# EAGLE board sanguino_stepstickers (EAGLE 6.3)
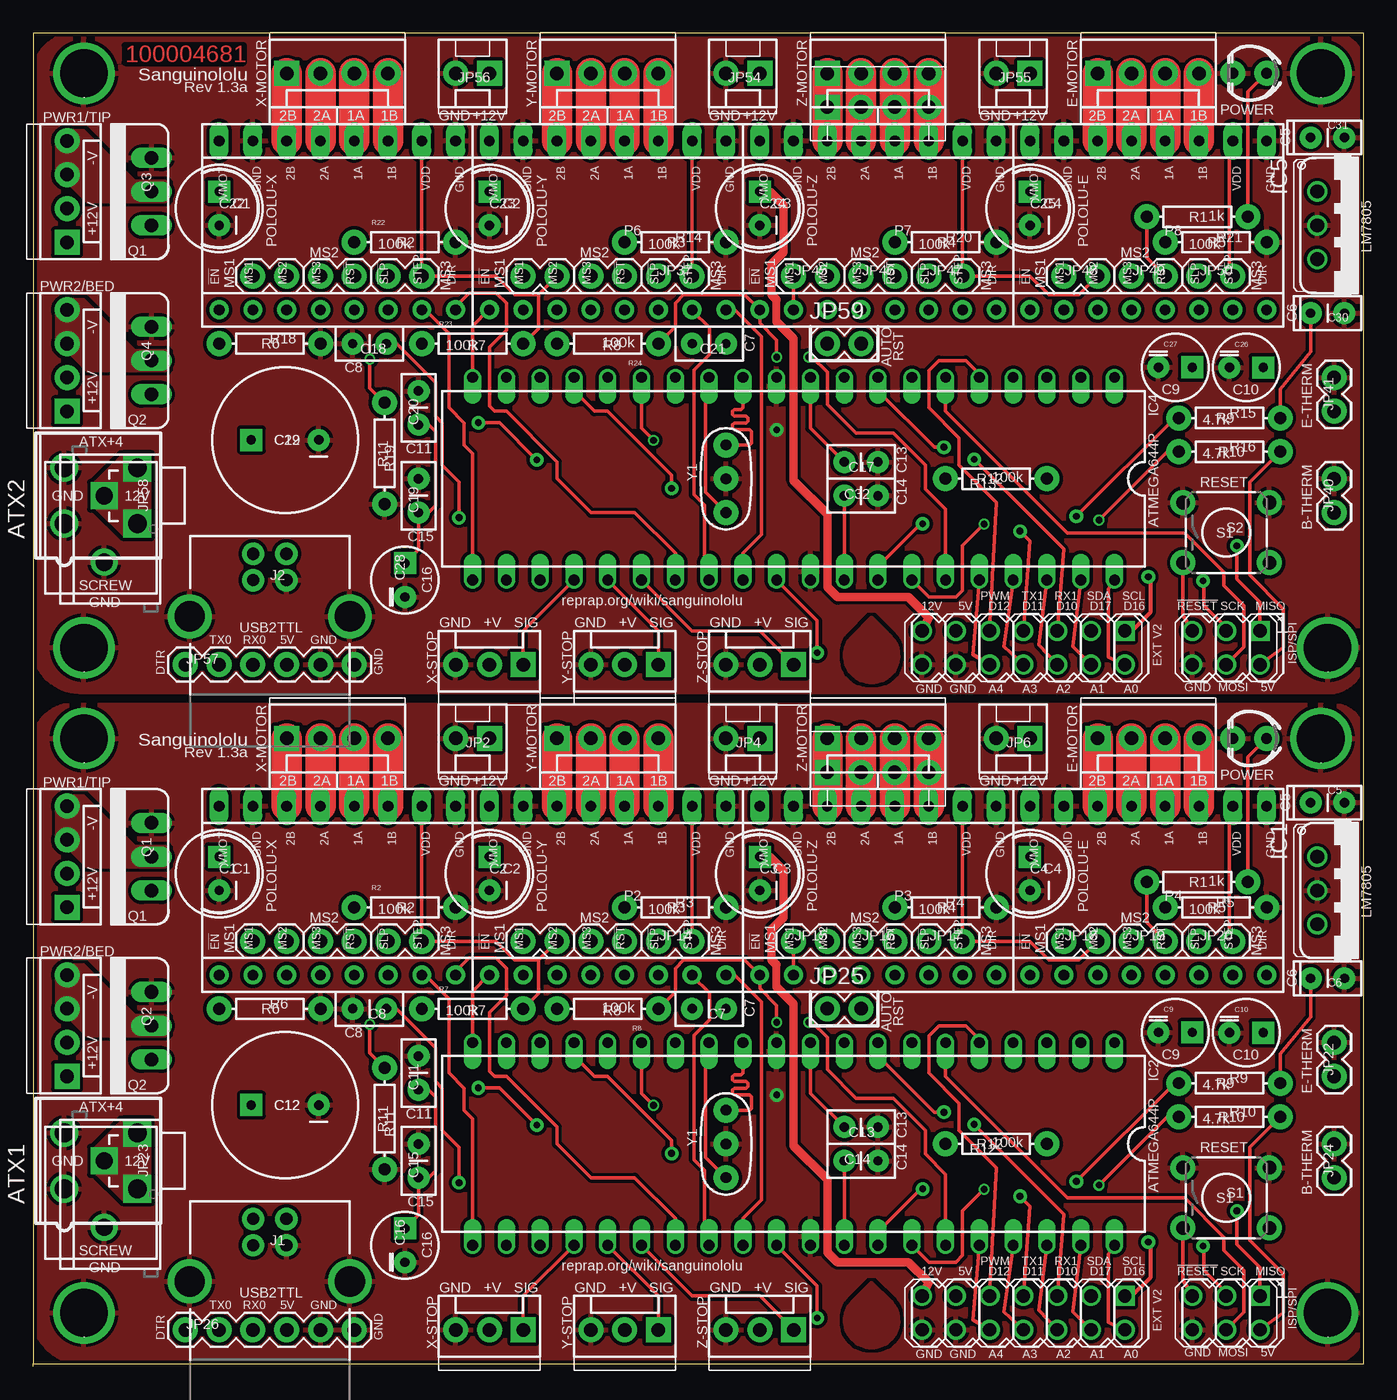
[diagram p0: board, top side]
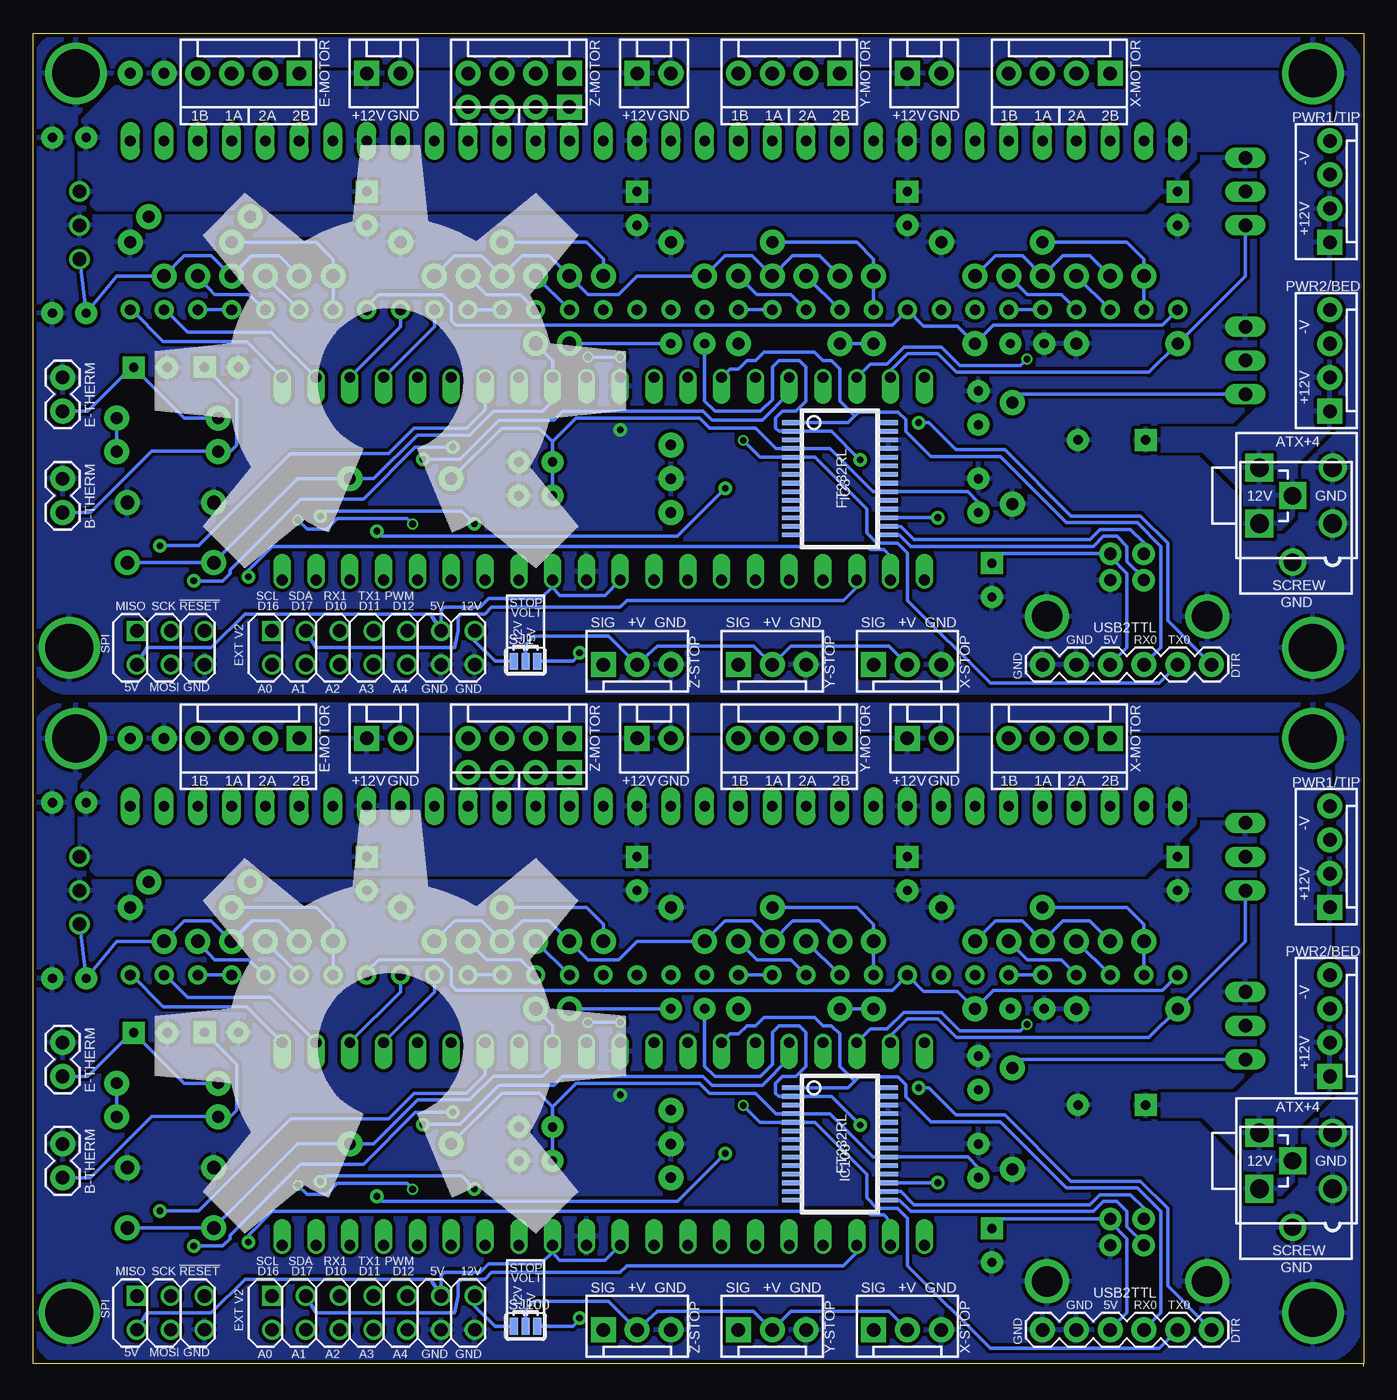
[diagram p1: board, bottom side, seen from below]

Size 100 x 100.2 mm. Coordinates in mm from the lower left corner, seen from the top.
Outline: 0,0 0,0.2
Outline: 0,0.2 100,0.2 100,100.2 0,100.2 0,0.2
Copper layers (1*16): Top 0.035mm / dielectric 1.5mm / Bottom 0.035mm
Design rules "ITead_rule": minimum track width 6mil, minimum drill 12mil, track to track 6mil, track to pad 6mil, pad to pad 6mil, via to via 6mil, smd to smd 0mil, copper to edge 10mil, drill to drill 10mil, minimum pad ring 10mil, minimum via ring 6mil, stop-mask expansion 2mil, vias tented up to drill 100mil, thermal gap 10mil

## Footprints (pad centres in the part's own frame; a part is rotated, then mirrored left to right if it is on the bottom)
MINIFITJR-4-VERTICAL = drill 1.4: 1 2.1,-2.75; 2 -2.1,-2.75 | drill 1.4 square: 3 2.1,2.75; 4 -2.1,2.75
CPOL-RADIAL-100UF-25V = drill 0.7 pad 1.651 square: 1 1.27,0 | drill 0.7 pad 1.651: 2 -1.27,0
CAP-PTH-SMALL2 = drill 0.7 pad 1.651: 1 0,0; 2 2.54,0
CPOL-RADIAL-10UF-25V = drill 0.7 pad 1.651 square: 1 1.27,0 | drill 0.7 pad 1.651: 2 -1.27,0
CPOL-RADIAL-1000UF-25V = drill 0.7 pad 1.651 square: 1 2.54,0 | drill 0.7 pad 1.651: 2 -2.54,0
78XXL-CUSTOM = drill 1.016: GND 0,0; IN -2.54,0; OUT 2.54,0
DIL40 = drill 0.813 offset: 1 -24.13,-7.62; 2 -21.59,-7.62; 3 -19.05,-7.62; 4 -16.51,-7.62; 5 -13.97,-7.62; 6 -11.43,-7.62; 7 -8.89,-7.62; 8 -6.35,-7.62; 9 -3.81,-7.62; 10 -1.27,-7.62; 11 1.27,-7.62; 12 3.81,-7.62; 13 6.35,-7.62; 14 8.89,-7.62; 15 11.43,-7.62; 16 13.97,-7.62; 17 16.51,-7.62; 18 19.05,-7.62; 19 21.59,-7.62; 20 24.13,-7.62; 21 24.13,7.62; 22 21.59,7.62; 23 19.05,7.62; 24 16.51,7.62; 25 13.97,7.62; 26 11.43,7.62; 27 8.89,7.62; 28 6.35,7.62; 29 3.81,7.62; 30 1.27,7.62; 31 -1.27,7.62; 32 -3.81,7.62; 33 -6.35,7.62; 34 -8.89,7.62; 35 -11.43,7.62; 36 -13.97,7.62; 37 -16.51,7.62; 38 -19.05,7.62; 39 -21.59,7.62; 40 -24.13,7.62
SSOP28DB = smd 0.348 x 1.397: 1 -4.225,-3.656; 2 -3.575,-3.656; 3 -2.925,-3.656; 4 -2.275,-3.656; 5 -1.625,-3.656; 6 -0.975,-3.656; 7 -0.325,-3.656; 8 0.325,-3.656; 9 0.975,-3.656; 10 1.625,-3.656; 11 2.275,-3.656; 12 2.925,-3.656; 13 3.575,-3.656; 14 4.225,-3.656; 15 4.225,3.656; 16 3.575,3.656; 17 2.925,3.656; 18 2.275,3.656; 19 1.625,3.656; 20 0.975,3.656; 21 0.325,3.656; 22 -0.325,3.656; 23 -0.975,3.656; 24 -1.625,3.656; 25 -2.275,3.656; 26 -2.925,3.656; 27 -3.575,3.656; 28 -4.225,3.656
USB-B-PTH = drill 0.914 pad 1.676: D+ 0,1.25; D- 1.981,1.25; GND 0,-1.25; VBUS 1.981,-1.25 | drill 2.286: P$1 -2.718,-6.02; P$2 -2.718,6.02
MOLEX-1X4 = drill 1.016 pad 1.88 square: 1 0,0 | drill 1.016 pad 1.88: 2 2.54,0; 3 5.08,0; 4 7.62,0
MOLEX-1X2 = drill 1.016 pad 1.88 square: 1 0,0 | drill 1.016 pad 1.88: 2 2.54,0
1X02 = drill 1.016 pad 1.88: 1 0,0; 2 2.54,0
SCREWTERMINAL-5MM-2 = drill 1.3 pad 2.032 square: 1 0,0 | drill 1.3 pad 2.032: 2 5,0
1X06 = drill 1.016 pad 1.88: 1 0,0; 2 2.54,0; 3 5.08,0; 4 7.62,0; 5 10.16,0; 6 12.7,0
MOLEX-1X3 = drill 1.016 pad 1.88 square: 1 0,0 | drill 1.016 pad 1.88: 2 2.54,0; 3 5.08,0
LED3MM = drill 0.813 pad 1.88: A -1.27,0; K 1.27,0
POLOLU-ALLEGRO-PTH = drill 0.8 pad 1.422 long: 1A 6.35,-1.27; 1B 6.35,-3.81; 2A 6.35,1.27; 2B 6.35,3.81; GNDMOT 6.35,6.35; GNDVDD 6.35,-8.89; VDD 6.35,-6.35; VMOT 6.35,8.89 | drill 0.8 pad 1.422: !EN -6.35,8.89; !RST -6.35,-1.27; !SLP -6.35,-3.81; DIR -6.35,-8.89; MS1 -6.35,6.35; MS2 -6.35,3.81; MS3 -6.35,1.27; STEP -6.35,-6.35
TO220V = drill 1.016 long: 1 -2.54,0; 2 0,0; 3 2.54,0
AXIAL-0.3 = drill 0.9 pad 1.88: P$1 -3.81,0; P$2 3.81,0
TACTILE-PTH = drill 1.016 pad 1.88: 1 -3.251,2.261; 2 3.251,2.261; 3 -3.251,-2.261; 4 3.251,-2.261
SJ_3 = smd 0.635 x 1.27: 1 -0.889,0; 2 0,0; 3 0.889,0
IO_HEADER-PLATEDSCREW = drill 1: 5V -5.08,-1.27; 5V1 -27.94,1.27; 12V -30.48,1.27; A0 -15.24,-1.27; A1 -17.78,-1.27; A2 -20.32,-1.27; A3 -22.86,-1.27; A4 -25.4,-1.27; GND -10.16,-1.27; GND1 -27.94,-1.27; GND2 -30.48,-1.27; MOSI -7.62,-1.27; PWM -25.4,1.27; RST -10.16,1.27; RX1 -20.32,1.27; SCK -7.62,1.27; SDA -17.78,1.27; TX1 -22.86,1.27 | drill 3.6: GNDSCREW 0,0 | drill 1 square: MISO -5.08,1.27; SCL -15.24,1.27
PLATEDSCREW = drill 3.6: GND 0,0
RESONATOR-PTH = drill 0.8 pad 1.88: 1 -2.54,0; 2 0,0; 3 2.54,0

## Placement (x,y rotation side)
ATX1  ATX-4VERTICAL  [MINIFITJR-4-VERTICAL]  5.08,15.44 270 top
ATX2  ATX-4VERTICAL  [MINIFITJR-4-VERTICAL]  5.08,65.44 270 top
C1  100uf  [CPOL-RADIAL-100UF-25V]  13.97,37.03 90 top
C2  100uf  [CPOL-RADIAL-100UF-25V]  34.29,37.03 90 top
C3  100uf  [CPOL-RADIAL-100UF-25V]  54.61,37.03 90 top
C4  100uf  [CPOL-RADIAL-100UF-25V]  74.93,37.03 90 top
C5  0.33uF  [CAP-PTH-SMALL2]  96.02,42.36 0 top
C6  0.1uF  [CAP-PTH-SMALL2]  96.02,29.16 0 top
C7  0.1uF  [CAP-PTH-SMALL2]  52.07,26.87 180 top
C8  0.1uF  [CAP-PTH-SMALL2]  26.54,26.87 180 top
C9  10uF  [CPOL-RADIAL-10UF-25V]  85.85,25.09 0 top
C10  10uF  [CPOL-RADIAL-10UF-25V]  91.19,25.08 0 top
C11  0.1uF  [CAP-PTH-SMALL2]  28.96,20.77 90 top
C12  1000uF  [CPOL-RADIAL-1000UF-25V]  18.92,19.63 180 top
C13  0.1uF  [CAP-PTH-SMALL2]  63.5,17.98 180 top
C14  0.1uF  [CAP-PTH-SMALL2]  60.96,15.44 0 top
C15  0.1uF  [CAP-PTH-SMALL2]  28.96,14.17 90 top
C16  4.7uF  [CPOL-RADIAL-10UF-25V]  27.94,9.09 90 top
C17  0.1uF  [CAP-PTH-SMALL2]  63.5,67.98 180 top
C18  0.1uF  [CAP-PTH-SMALL2]  26.54,76.87 180 top
C19  0.1uF  [CAP-PTH-SMALL2]  28.96,64.17 90 top
C20  0.1uF  [CAP-PTH-SMALL2]  28.96,70.77 90 top
C21  0.1uF  [CAP-PTH-SMALL2]  52.07,76.87 180 top
C22  100uf  [CPOL-RADIAL-100UF-25V]  13.97,87.03 90 top
C23  100uf  [CPOL-RADIAL-100UF-25V]  34.29,87.03 90 top
C24  100uf  [CPOL-RADIAL-100UF-25V]  54.61,87.03 90 top
C25  100uf  [CPOL-RADIAL-100UF-25V]  74.93,87.03 90 top
C26  10uF  [CPOL-RADIAL-10UF-25V]  91.19,75.08 0 top
C27  10uF  [CPOL-RADIAL-10UF-25V]  85.85,75.09 0 top
C28  4.7uF  [CPOL-RADIAL-10UF-25V]  27.94,59.09 90 top
C29  1000uF  [CPOL-RADIAL-1000UF-25V]  18.92,69.63 180 top
C30  0.1uF  [CAP-PTH-SMALL2]  96.02,79.16 0 top
C31  0.33uF  [CAP-PTH-SMALL2]  96.02,92.36 0 top
C32  0.1uF  [CAP-PTH-SMALL2]  60.96,65.44 0 top
IC1  LM7805  [78XXL-CUSTOM]  96.52,35.76 270 top
IC2  ATMEGA644-20PU  [DIL40]  57.15,16.71 180 top
IC3  FT232RL  [SSOP28DB]  39.37,66.71 270 bottom
IC4  ATMEGA644-20PU  [DIL40]  57.15,66.71 180 top
IC5  LM7805  [78XXL-CUSTOM]  96.52,85.76 270 top
IC100  FT232RL  [SSOP28DB]  39.37,16.71 270 bottom
J1  USB  [USB-B-PTH]  17.78,9.09 90 top
J2  USB  [USB-B-PTH]  17.78,59.09 90 top
JP1  MOT-X  [MOLEX-1X4]  19.05,47.19 0 top
JP2  12VPWR  [MOLEX-1X2]  34.29,47.19 180 top
JP3  MOT-Y  [MOLEX-1X4]  39.37,47.19 0 top
JP4  12VPWR  [MOLEX-1X2]  54.61,47.19 180 top
JP5  MOT-Z  [MOLEX-1X4]  59.69,47.19 0 top
JP6  12VPWR  [MOLEX-1X2]  74.93,47.19 180 top
JP7  MOT-E  [MOLEX-1X4]  80.01,47.19 0 top
JP8  HOTEND  [MOLEX-1X4]  2.54,34.49 90 top
JP9  X-MS1  [1X02]  16.51,31.95 0 top
JP10  X-MS2  [1X02]  21.59,31.95 0 top
JP11  X-MS3  [1X02]  26.67,31.95 0 top
JP12  Y-MS1  [1X02]  36.83,31.95 0 top
JP13  Y-MS2  [1X02]  41.91,31.95 0 top
JP14  Y-MS3  [1X02]  46.99,31.95 0 top
JP15  Z-MS1  [1X02]  57.15,31.95 0 top
JP16  Z-MS2  [1X02]  62.23,31.95 0 top
JP17  Z-MS3  [1X02]  67.31,31.95 0 top
JP18  E-MS1  [1X02]  77.47,31.95 0 top
JP19  E-MS2  [1X02]  82.55,31.95 0 top
JP20  E-MS3  [1X02]  87.63,31.95 0 top
JP21  HOTBED  [MOLEX-1X4]  2.54,21.79 90 top
JP22  E-THERM  [1X02]  97.79,21.79 90 top
JP23  SCREW  [SCREWTERMINAL-5MM-2]  5.33,15.44 270 top
JP24  B-THERM  [1X02]  97.79,14.17 90 top
JP25  AUTO RESET  [1X02]  59.69,26.87 0 top
JP26  USB2TTL  [1X06]  11.43,2.74 0 top
JP27  X-STOP  [MOLEX-1X3]  36.83,2.74 180 top
JP28  Y-STOP  [MOLEX-1X3]  46.99,2.74 180 top
JP29  Z-STOP  [MOLEX-1X3]  57.15,2.74 180 top
JP30  MOT-Z  [MOLEX-1X4]  59.69,44.65 0 top
JP31  MOT-X  [MOLEX-1X4]  19.05,97.19 0 top
JP32  MOT-Y  [MOLEX-1X4]  39.37,97.19 0 top
JP33  MOT-Z  [MOLEX-1X4]  59.69,97.19 0 top
JP34  MOT-E  [MOLEX-1X4]  80.01,97.19 0 top
JP35  Y-MS1  [1X02]  36.83,81.95 0 top
JP36  Y-MS2  [1X02]  41.91,81.95 0 top
JP37  Y-MS3  [1X02]  46.99,81.95 0 top
JP38  HOTEND  [MOLEX-1X4]  2.54,84.49 90 top
JP39  HOTBED  [MOLEX-1X4]  2.54,71.79 90 top
JP40  B-THERM  [1X02]  97.79,64.17 90 top
JP41  E-THERM  [1X02]  97.79,71.79 90 top
JP42  X-STOP  [MOLEX-1X3]  36.83,52.74 180 top
JP43  Y-STOP  [MOLEX-1X3]  46.99,52.74 180 top
JP44  Z-STOP  [MOLEX-1X3]  57.15,52.74 180 top
JP45  Z-MS1  [1X02]  57.15,81.95 0 top
JP46  Z-MS2  [1X02]  62.23,81.95 0 top
JP47  Z-MS3  [1X02]  67.31,81.95 0 top
JP48  E-MS1  [1X02]  77.47,81.95 0 top
JP49  E-MS2  [1X02]  82.55,81.95 0 top
JP50  E-MS3  [1X02]  87.63,81.95 0 top
JP51  X-MS1  [1X02]  16.51,81.95 0 top
JP52  X-MS2  [1X02]  21.59,81.95 0 top
JP53  X-MS3  [1X02]  26.67,81.95 0 top
JP54  12VPWR  [MOLEX-1X2]  54.61,97.19 180 top
JP55  12VPWR  [MOLEX-1X2]  74.93,97.19 180 top
JP56  12VPWR  [MOLEX-1X2]  34.29,97.19 180 top
JP57  USB2TTL  [1X06]  11.43,52.74 0 top
JP58  SCREW  [SCREWTERMINAL-5MM-2]  5.33,65.44 270 top
JP59  AUTO RESET  [1X02]  59.69,76.87 0 top
JP60  MOT-Z  [MOLEX-1X4]  59.69,94.65 0 top
LED1  POWER  [LED3MM]  91.44,47.19 180 top
LED2  POWER  [LED3MM]  91.44,97.19 180 top
P1  POLOLU-X  [POLOLU-ALLEGRO-PTH]  22.86,35.76 90 top
P2  POLOLU-Y  [POLOLU-ALLEGRO-PTH]  43.18,35.76 90 top
P3  POLOLU-Z  [POLOLU-ALLEGRO-PTH]  63.5,35.76 90 top
P4  POLOLU-E  [POLOLU-ALLEGRO-PTH]  83.82,35.76 90 top
P5  POLOLU-X  [POLOLU-ALLEGRO-PTH]  22.86,85.76 90 top
P6  POLOLU-Y  [POLOLU-ALLEGRO-PTH]  43.18,85.76 90 top
P7  POLOLU-Z  [POLOLU-ALLEGRO-PTH]  63.5,85.76 90 top
P8  POLOLU-E  [POLOLU-ALLEGRO-PTH]  83.82,85.76 90 top
Q1  RFP30N06LE  [TO220V]  8.89,38.3 90 top
Q2  RFP30N06LE  [TO220V]  8.89,25.6 90 top
Q3  RFP30N06LE  [TO220V]  8.89,88.3 90 top
Q4  RFP30N06LE  [TO220V]  8.89,75.6 90 top
R1  1k  [AXIAL-0.3]  87.5,36.4 180 top
R2  100k  [AXIAL-0.3]  27.94,34.49 0 top
R3  100k  [AXIAL-0.3]  48.26,34.49 0 top
R4  100k  [AXIAL-0.3]  68.58,34.49 0 top
R5  100k  [AXIAL-0.3]  88.9,34.49 0 top
R6  10k  [AXIAL-0.3]  17.78,26.87 0 top
R7  100k  [AXIAL-0.3]  33.02,26.87 0 top
R8  100k  [AXIAL-0.3]  43.18,26.87 180 top
R9  4.7k  [AXIAL-0.3]  89.92,21.28 0 top
R10  4.7k  [AXIAL-0.3]  89.92,18.74 0 top
R11  10k  [AXIAL-0.3]  26.42,18.61 270 top
R12  100k  [AXIAL-0.3]  72.39,16.71 180 top
R13  100k  [AXIAL-0.3]  72.39,66.71 180 top
R14  100k  [AXIAL-0.3]  48.26,84.49 0 top
R15  4.7k  [AXIAL-0.3]  89.92,71.28 0 top
R16  4.7k  [AXIAL-0.3]  89.92,68.74 0 top
R17  1k  [AXIAL-0.3]  87.5,86.39 180 top
R18  10k  [AXIAL-0.3]  17.78,76.87 0 top
R19  10k  [AXIAL-0.3]  26.42,68.62 270 top
R20  100k  [AXIAL-0.3]  68.58,84.49 0 top
R21  100k  [AXIAL-0.3]  88.9,84.49 0 top
R22  100k  [AXIAL-0.3]  27.94,84.49 0 top
R23  100k  [AXIAL-0.3]  33.02,76.87 0 top
R24  100k  [AXIAL-0.3]  43.18,76.87 180 top
S1  RESET  [TACTILE-PTH]  89.68,12.66 0 top
S2  RESET  [TACTILE-PTH]  89.68,62.66 0 top
SJ1  5v/12v  [SJ_3]  62.99,52.99 0 bottom
SJ100  5v/12v  [SJ_3]  62.99,2.99 0 bottom
U$1  IO_HEADERS_SCREW  [IO_HEADER-PLATEDSCREW]  97.29,54.01 0 top
U$2  PLATED-SCREW  [PLATEDSCREW]  3.81,54.01 0 top
U$3  PLATED-SCREW  [PLATEDSCREW]  3.81,97.19 0 top
U$4  PLATED-SCREW  [PLATEDSCREW]  96.79,97.19 0 top
U$17  PLATED-SCREW  [PLATEDSCREW]  3.81,4.01 0 top
U$24  IO_HEADERS_SCREW  [IO_HEADER-PLATEDSCREW]  97.29,4.01 0 top
U$37  PLATED-SCREW  [PLATEDSCREW]  3.81,47.19 0 top
U$38  PLATED-SCREW  [PLATEDSCREW]  96.79,47.19 0 top
Y1  16MHz 22pF  [RESONATOR-PTH]  52.07,16.71 270 top
Y2  16MHz 22pF  [RESONATOR-PTH]  52.07,66.71 270 top

## Library data of the parts
ATX1 ATX2 = atx-power-supply
C1-C32 IC1 IC3 IC5 IC100 J1 J2 JP1-JP60 LED1 LED2 Q1-Q4 R1-R24 S1 S2 SJ1 SJ100 Y1 Y2 = SparkFun
IC2 IC4 = atmel; MPN: ATMEGA644-20PU; OC_FARNELL: 1288340; OC_NEWARK: 23M5060
P1-P8 = pololu-allegro
U$1-U$4 U$17 U$24 U$37 U$38 = Sanguinololu

## Nets
3V1: C18.1 IC3.17
3V3: C8.1 IC100.17
5V: C6.1 C11.1 C13.2 C14.1 C15.1 C16.1 IC1.OUT IC2.10 IC2.30 IC2.32 IC100.4 IC100.20 J1.VBUS JP9.2 JP10.2 JP11.2 JP12.2 JP13.2 JP14.2 JP15.2 JP16.2 JP17.2 JP18.2 JP19.2 JP20.2 JP26.4 P1.VDD P2.VDD P3.VDD P4.VDD R1.P$2 R7.P$2 R8.P$2 R9.P$2 R10.P$2 R12.P$2 SJ100.3 U$24.5V U$24.5V1
5V1: C17.2 C19.1 C20.1 C28.1 C30.1 C32.1 IC3.4 IC3.20 IC4.10 IC4.30 IC4.32 IC5.OUT J2.VBUS JP35.2 JP36.2 JP37.2 JP45.2 JP46.2 JP47.2 JP48.2 JP49.2 JP50.2 JP51.2 JP52.2 JP53.2 JP57.4 P5.VDD P6.VDD P7.VDD P8.VDD R13.P$2 R15.P$2 R16.P$2 R17.P$2 R23.P$2 R24.P$2 SJ1.3 U$1.5V U$1.5V1
12V: ATX1.3 ATX1.4 C1.1 C2.1 C3.1 C4.1 C5.1 C12.1 IC1.IN JP2.1 JP4.1 JP6.1 JP8.1 JP8.2 JP21.1 JP21.2 JP23.1 P1.VMOT P2.VMOT P3.VMOT P4.VMOT SJ100.1 U$24.12V
12V1: ATX2.3 ATX2.4 C22.1 C23.1 C24.1 C25.1 C29.1 C31.1 IC5.IN JP38.1 JP38.2 JP39.1 JP39.2 JP54.1 JP55.1 JP56.1 JP58.1 P5.VMOT P6.VMOT P7.VMOT P8.VMOT SJ1.1 U$1.12V
!FTDI-RESET: C7.1 JP25.1
!FTDI-RESET1: C21.1 JP59.1
!HOTBED: IC2.18 Q2.1 R11.P$1
!HOTBED1: IC4.18 Q4.1 R19.P$1
!HOTEND: IC2.19 Q1.1 R6.P$1
!HOTEND1: IC4.19 Q3.1 R18.P$1
!RESET: IC2.9 JP25.2 R12.P$1 S1.3 S1.4 U$24.RST
!RESET1: IC4.9 JP59.2 R13.P$1 S2.3 S2.4 U$1.RST
!STEP-ENABLE: IC2.20 P1.!EN P2.!EN P4.!EN R7.P$1
!STEP-ENABLE1: IC4.20 P5.!EN P6.!EN P8.!EN R23.P$1
!STEP-ENABLE-Z: IC2.35 P3.!EN R8.P$1
!STEP-ENABLE-Z1: IC4.35 P7.!EN R24.P$1
#DTR: C7.2 IC100.2 JP26.1
#DTR1: C21.2 IC3.2 JP57.1
A0: IC2.40 U$24.A0
A1: IC2.39 U$24.A1
A2: IC2.38 U$24.A2
A3: IC2.37 U$24.A3
A4: IC2.36 U$24.A4
A5: IC4.40 U$1.A0
A6: IC4.39 U$1.A1
A7: IC4.38 U$1.A2
A8: IC4.37 U$1.A3
A9: IC4.36 U$1.A4
AIFO: IC2.14 IC100.1 JP26.3
AIFO1: IC3.1 IC4.14 JP57.3
AOFI: IC2.15 IC100.5 JP26.2
AOFI1: IC3.5 IC4.15 JP57.2
B-THERM: C9.1 IC2.34 JP24.1 R10.P$1
B-THERM1: C27.1 IC4.34 JP40.1 R16.P$1
E-DIR: IC2.1 P4.DIR
E-DIR1: IC4.1 P8.DIR
E-MOT-1A [power]: JP7.3 P4.1A
E-MOT-1A1 [power]: JP34.3 P8.1A
E-MOT-1B [power]: JP7.4 P4.1B
E-MOT-1B1 [power]: JP34.4 P8.1B
E-MOT-2A [power]: JP7.2 P4.2A
E-MOT-2A1 [power]: JP34.2 P8.2A
E-MOT-2B [power]: JP7.1 P4.2B
E-MOT-2B1 [power]: JP34.1 P8.2B
E-MS1: JP18.1 P4.MS1 R5.P$1
E-MS2: JP19.1 P4.MS2
E-MS3: JP20.1 P4.MS3
E-MS4: JP48.1 P8.MS1 R21.P$1
E-MS5: JP49.1 P8.MS2
E-MS6: JP50.1 P8.MS3
E-RESETSLEEP: P4.!RST P4.!SLP
E-RESETSLEEP1: P8.!RST P8.!SLP
E-STEP: IC2.2 P4.STEP
E-STEP1: IC4.2 P8.STEP
E-THERM: C10.1 IC2.33 JP22.1 R9.P$1
E-THERM1: C26.1 IC4.33 JP41.1 R15.P$1
ENDSTOP+V: JP27.2 JP28.2 JP29.2 SJ100.2
ENDSTOP+V1: JP42.2 JP43.2 JP44.2 SJ1.2
GND [power]: ATX1.1 ATX1.2 C1.2 C2.2 C3.2 C4.2 C5.2 C6.2 C8.2 C9.2 C10.2 C11.2 C12.2 C13.1 C14.2 C15.2 C16.2 IC1.GND IC2.11 IC2.31 IC100.7 IC100.18 IC100.21 IC100.25 IC100.26 J1.GND J1.P$1 J1.P$2 JP2.2 JP4.2 JP6.2 JP22.2 JP23.2 JP24.2 JP26.5 JP26.6 JP27.3 JP28.3 JP29.3 LED1.K P1.GNDMOT P1.GNDVDD P2.GNDMOT P2.GNDVDD P3.GNDMOT P3.GNDVDD P4.GNDMOT P4.GNDVDD Q1.3 Q2.3 R2.P$2 R3.P$2 R4.P$2 R5.P$2 R6.P$2 R11.P$2 S1.1 S1.2 U$17.GND U$24.GND U$24.GND1 U$24.GND2 U$24.GNDSCREW U$37.GND U$38.GND Y1.2
GND1 [power]: ATX2.1 ATX2.2 C17.1 C18.2 C19.2 C20.2 C22.2 C23.2 C24.2 C25.2 C26.2 C27.2 C28.2 C29.2 C30.2 C31.2 C32.2 IC3.7 IC3.18 IC3.21 IC3.25 IC3.26 IC4.11 IC4.31 IC5.GND J2.GND J2.P$1 J2.P$2 JP40.2 JP41.2 JP42.3 JP43.3 JP44.3 JP54.2 JP55.2 JP56.2 JP57.5 JP57.6 JP58.2 LED2.K P5.GNDMOT P5.GNDVDD P6.GNDMOT P6.GNDVDD P7.GNDMOT P7.GNDVDD P8.GNDMOT P8.GNDVDD Q3.3 Q4.3 R14.P$2 R18.P$2 R19.P$2 R20.P$2 R21.P$2 R22.P$2 S2.1 S2.2 U$1.GND U$1.GND1 U$1.GND2 U$1.GNDSCREW U$2.GND U$3.GND U$4.GND Y2.2
HOTBED-GND [power]: JP21.3 JP21.4 Q2.2
HOTBED-GND1 [power]: JP39.3 JP39.4 Q4.2
HOTEND-GND [power]: JP8.3 JP8.4 Q1.2
HOTEND-GND1 [power]: JP38.3 JP38.4 Q3.2
LED1: LED1.A R1.P$1
LED2: LED2.A R17.P$1
PB4-PWM: IC2.5 U$24.PWM
PB4-PWM1: IC4.5 U$1.PWM
PB5-MOSI: IC2.6 U$24.MOSI
PB5-MOSI1: IC4.6 U$1.MOSI
PB6-MISO: IC2.7 U$24.MISO
PB6-MISO1: IC4.7 U$1.MISO
PB7-SCK: IC2.8 U$24.SCK
PB7-SCK1: IC4.8 U$1.SCK
PC0-SCL: IC2.22 U$24.SCL
PC0-SCL1: IC4.22 U$1.SCL
PC1-SDA: IC2.23 U$24.SDA
PC1-SDA1: IC4.23 U$1.SDA
PD2-RX1: IC2.16 U$24.RX1
PD2-RX2: IC4.16 U$1.RX1
PD3-TX1: IC2.17 U$24.TX1
PD3-TX2: IC4.17 U$1.TX1
USBDM: IC100.16 J1.D-
USBDM1: IC3.16 J2.D-
USBDP: IC100.15 J1.D+
USBDP1: IC3.15 J2.D+
X-DIR: IC2.27 P1.DIR
X-DIR1: IC4.27 P5.DIR
X-MOT-1A [power]: JP1.3 P1.1A
X-MOT-1A1 [power]: JP31.3 P5.1A
X-MOT-1B [power]: JP1.4 P1.1B
X-MOT-1B1 [power]: JP31.4 P5.1B
X-MOT-2A [power]: JP1.2 P1.2A
X-MOT-2A1 [power]: JP31.2 P5.2A
X-MOT-2B [power]: JP1.1 P1.2B
X-MOT-2B1 [power]: JP31.1 P5.2B
X-MS1: JP9.1 P1.MS1 R2.P$1
X-MS2: JP10.1 P1.MS2
X-MS3: JP11.1 P1.MS3
X-MS4: JP52.1 P5.MS2
X-MS5: JP53.1 P5.MS3
X-MS6: JP51.1 P5.MS1 R22.P$1
X-RESETSLEEP: P1.!RST P1.!SLP
X-RESETSLEEP1: P5.!RST P5.!SLP
X-STEP: IC2.21 P1.STEP
X-STEP1: IC4.21 P5.STEP
X-STOP: IC2.24 JP27.1
X-STOP1: IC4.24 JP42.1
XTAL1: IC2.13 Y1.3
XTAL2: IC2.12 Y1.1
XTAL3: IC4.12 Y2.1
XTAL4: IC4.13 Y2.3
Y-DIR: IC2.29 P2.DIR
Y-DIR1: IC4.29 P6.DIR
Y-MOT-1A [power]: JP3.3 P2.1A
Y-MOT-1A1 [power]: JP32.3 P6.1A
Y-MOT-1B [power]: JP3.4 P2.1B
Y-MOT-1B1 [power]: JP32.4 P6.1B
Y-MOT-2A [power]: JP3.2 P2.2A
Y-MOT-2A1 [power]: JP32.2 P6.2A
Y-MOT-2B [power]: JP3.1 P2.2B
Y-MOT-2B1 [power]: JP32.1 P6.2B
Y-MS1: JP12.1 P2.MS1 R3.P$1
Y-MS2: JP13.1 P2.MS2
Y-MS3: JP14.1 P2.MS3
Y-MS4: JP35.1 P6.MS1 R14.P$1
Y-MS5: JP36.1 P6.MS2
Y-MS6: JP37.1 P6.MS3
Y-RESETSLEEP: P2.!RST P2.!SLP
Y-RESETSLEEP1: P6.!RST P6.!SLP
Y-STEP: IC2.28 P2.STEP
Y-STEP1: IC4.28 P6.STEP
Y-STOP: IC2.25 JP28.1
Y-STOP1: IC4.25 JP43.1
Z-DIR: IC2.3 P3.DIR
Z-DIR1: IC4.3 P7.DIR
Z-MOT-1A [power]: JP5.3 JP30.3 P3.1A
Z-MOT-1A1 [power]: JP33.3 JP60.3 P7.1A
Z-MOT-1B [power]: JP5.4 JP30.4 P3.1B
Z-MOT-1B1 [power]: JP33.4 JP60.4 P7.1B
Z-MOT-2A [power]: JP5.2 JP30.2 P3.2A
Z-MOT-2A1 [power]: JP33.2 JP60.2 P7.2A
Z-MOT-2B [power]: JP5.1 JP30.1 P3.2B
Z-MOT-2B1 [power]: JP33.1 JP60.1 P7.2B
Z-MS1: JP15.1 P3.MS1 R4.P$1
Z-MS2: JP16.1 P3.MS2
Z-MS3: JP17.1 P3.MS3
Z-MS4: JP46.1 P7.MS2
Z-MS5: JP47.1 P7.MS3
Z-MS6: JP45.1 P7.MS1 R20.P$1
Z-RESETSLEEP: P3.!RST P3.!SLP
Z-RESETSLEEP1: P7.!RST P7.!SLP
Z-STEP: IC2.4 P3.STEP
Z-STEP1: IC4.4 P7.STEP
Z-STOP: IC2.26 JP29.1
Z-STOP1: IC4.26 JP44.1

## Tracks (layer width: path | path; a pad name or v marks a point on that pad's centre or on a via)
3V1  (via drill 0.51 pad 1.02)
  Top 0.254: v32,63.79 32,66.46 30.73,67.73 30.73,70.9 30.23,71.41 30.23,73.95 27.3,76.87 C18.1
  Bottom 0.254: v32,63.79 IC3.17
3V3  (via drill 0.51 pad 1.02)
  Top 0.254: v32,13.79 32,16.46 30.73,17.73 30.73,20.9 30.23,21.41 30.23,23.95 27.3,26.87 C8.1
  Bottom 0.254: v32,13.79 IC100.17
5V  (via drill 0.51 pad 1.02)
  Top 0.254: C14.1 IC2.32 | IC2.10 58.42,20.52 C13.2 | v58.93,3.63 58.93,6.04 IC2.30 | C16.1 28.96,11.38 C15.1 29.72,14.17 30.23,14.68 30.23,20.27 29.72,20.77 C11.1 | P1.VDD JP11.2 34.8,31.95 36.2,30.55 37.97,30.55 | JP14.2 P2.VDD | P3.VDD JP17.2 74.93,31.95 76.33,30.55 78.61,30.55 JP18.2 | JP12.2 37.97,30.55 | R1.P$2 83.69,33.35 JP19.2 | JP20.2 89.92,32.2 89.92,41.86 P4.VDD | R9.P$2 93.73,23.47 96.02,26.26 C6.1 | U$24.5V 93.98,4.01 93.98,6.93 91.44,9.47 91.44,16.46 R10.P$2 | R7.P$2 37.97,28.01 37.97,30.55
  Bottom 0.254: IC100.20 35.71,15.69 | 60.96,8.58 60.45,7.95 57.02,7.95 IC2.30 | IC2.32 60.96,8.58 | IC100.20 36.87,15.73 40.12,18.98 IC100.4 44.19,18.98 45.72,20.52 49.15,20.52 49.91,21.28 59.18,21.28 60.96,19.5 | R12.P$2 64.77,20.52 61.98,20.52 60.96,19.5 | 60.96,19.5 C13.2 C14.1 | IC100.20 29.76,15.73 28.96,14.93 C15.1 | JP26.4 17.78,4.01 17.78,9.6 19.03,10.85 J1.VBUS 27.23,11.07 C16.1 | U$24.5V 91.44,4.01 86.61,4.01 84.07,6.55 70.12,6.55 U$24.5V1 69.35,6.8 69.09,7.06 66.42,7.06 65.79,7.69 61.85,7.69 60.96,8.58 | R10.P$2 R9.P$2 | JP9.2 20.57,33.47 22.61,33.47 JP10.2 25.65,33.47 27.69,33.47 JP11.2 | JP12.2 40.89,33.47 42.93,33.47 JP13.2 45.97,33.47 48.01,33.47 JP14.2 54.61,31.95 56.01,30.55 58.29,30.55 JP15.2 61.21,33.47 63.25,33.47 JP16.2 66.29,33.47 68.33,33.47 JP17.2 | JP18.2 81.53,33.47 83.57,33.47 | JP19.2 86.61,33.47 88.65,33.47 JP20.2 93.73,31.95 C6.1 IC1.OUT | SJ100.3 59.44,2.99 58.93,3.5 v58.93,3.63 | R7.P$2 R8.P$2
  Bottom 0.305: JP19.2 83.57,33.47
5V1  (via drill 0.51 pad 1.02)
  Top 0.254: C32.1 IC4.32 | IC4.10 58.42,70.52 C17.2 | v58.93,53.63 58.93,56.04 IC4.30 | C28.1 28.96,61.38 C19.1 29.72,64.17 30.23,64.68 30.23,70.27 29.72,70.77 C20.1 | P5.VDD JP53.2 34.8,81.95 36.2,80.55 37.97,80.55 | JP37.2 P6.VDD | P7.VDD JP47.2 74.93,81.95 76.33,80.55 78.61,80.55 JP48.2 | JP35.2 37.97,80.55 | R17.P$2 83.69,83.35 JP49.2 | JP50.2 89.92,82.2 89.92,91.86 P8.VDD | R15.P$2 93.73,73.47 96.02,76.26 C30.1 | U$1.5V 93.98,54.01 93.98,56.93 91.44,59.47 91.44,66.46 R16.P$2 | R23.P$2 37.97,78.01 37.97,80.55
  Bottom 0.254: IC3.20 35.71,65.69 | 60.96,58.58 60.45,57.95 57.02,57.95 IC4.30 | IC4.32 60.96,58.58 | IC3.20 36.87,65.73 40.12,68.98 IC3.4 44.19,68.98 45.72,70.52 49.15,70.52 49.91,71.28 59.18,71.28 60.96,69.5 | R13.P$2 64.77,70.52 61.98,70.52 60.96,69.5 | 60.96,69.5 C17.2 C32.1 | IC3.20 29.76,65.73 28.96,64.93 C19.1 | JP57.4 17.78,54.01 17.78,59.6 19.03,60.85 J2.VBUS 27.23,61.07 C28.1 | U$1.5V 91.44,54.01 86.61,54.01 84.07,56.55 70.12,56.55 U$1.5V1 69.35,56.8 69.09,57.06 66.42,57.06 65.79,57.69 61.85,57.69 60.96,58.58 | R16.P$2 R15.P$2 | JP51.2 20.57,83.47 22.61,83.47 JP52.2 25.65,83.47 27.69,83.47 JP53.2 | JP35.2 40.89,83.47 42.93,83.47 JP36.2 45.97,83.47 48.01,83.47 JP37.2 54.61,81.95 56.01,80.55 58.29,80.55 JP45.2 61.21,83.47 63.25,83.47 JP46.2 66.29,83.47 68.33,83.47 JP47.2 | JP48.2 81.53,83.47 83.57,83.47 | JP49.2 86.61,83.47 88.65,83.47 JP50.2 93.73,81.95 C30.1 IC5.OUT | SJ1.3 59.44,52.99 58.93,53.5 v58.93,53.63 | R23.P$2 R24.P$2
  Bottom 0.305: JP49.2 83.57,83.47
12V
  Top 0.584: 55.88,28.52 55.88,30.17
  Top 0.635: C3.1 55.37,38.3 56.39,37.28 56.39,33.73 55.5,32.84 55.5,30.55 55.88,30.17 | 55.88,28.52 57.15,27.25 57.15,16.58 59.69,14.04 59.69,8.58 60.45,7.82 65.79,7.82 67.31,6.3 U$24.12V
  Bottom 0.254: SJ100.1 65.29,2.99 66.81,4.52 U$24.12V
  pour Bottom (isolate 0.254): 2.54,20.52 2.54,44.65 5.08,47.19 92.71,47.19 96.52,43.38 96.52,38.3 95.25,37.03 16.51,37.03 15.24,38.3 13.97,38.3 13.97,39.57 12.7,40.84 12.7,41.48 7.62,41.48 7.62,22.3 9.53,20.39 17.14,20.39 17.14,18.87 12.06,18.87 8.89,15.69 8.89,12.9 6.35,12.9 5.08,14.17 5.08,17.98
  pour Top (no thermals): 4.7,16.46 6.73,18.49 8.76,18.49 8.76,12.39 6.86,12.39 4.7,14.55
12V1
  Top 0.584: 55.88,78.52 55.88,80.17
  Top 0.635: C24.1 55.37,88.3 56.39,87.28 56.39,83.73 55.5,82.84 55.5,80.55 55.88,80.17 | 55.88,78.52 57.15,77.25 57.15,66.58 59.69,64.04 59.69,58.58 60.45,57.82 65.79,57.82 67.31,56.3 U$1.12V
  Bottom 0.254: SJ1.1 65.29,52.99 66.81,54.52 U$1.12V
  pour Bottom (isolate 0.254): 2.54,70.52 2.54,94.65 5.08,97.19 92.71,97.19 96.52,93.38 96.52,88.3 95.25,87.03 16.51,87.03 15.24,88.3 13.97,88.3 13.97,89.57 12.7,90.84 12.7,91.48 7.62,91.48 7.62,72.3 9.53,70.39 17.14,70.39 17.14,68.87 12.06,68.87 8.89,65.69 8.89,62.9 6.35,62.9 5.08,64.17 5.08,67.98
  pour Top (no thermals): 4.7,66.46 6.73,68.49 8.76,68.49 8.76,62.39 6.86,62.39 4.7,64.55
!FTDI-RESET
  Bottom 0.254: C7.1 JP25.1
!FTDI-RESET1
  Bottom 0.254: C21.1 JP59.1
!HOTBED  (via drill 0.51)
  Top 0.254: v25.3,25.7 25.3,23.54 R11.P$1
  Bottom 0.254: Q2.1 25.78,23.06 R11.P$1 | v25.3,25.7 25.78,25.22 30.35,25.22 31.75,26.62 34.54,26.62 35.81,25.35 37.08,25.35 IC2.18
!HOTBED1  (via drill 0.51)
  Top 0.254: v25.3,75.7 25.3,73.54 R19.P$1
  Bottom 0.254: Q4.1 25.78,73.06 R19.P$1 | v25.3,75.7 25.78,75.22 30.35,75.22 31.75,76.62 34.54,76.62 35.81,75.35 37.08,75.35 IC4.18
!HOTEND
  Bottom 0.254: IC2.19 35.56,24.84 34.29,26.11 32,26.11 30.61,24.71 16.13,24.71 R6.P$1 8.89,31.95 Q1.1
!HOTEND1
  Bottom 0.254: IC4.19 35.56,74.84 34.29,76.11 32,76.11 30.61,74.71 16.13,74.71 R18.P$1 8.89,81.95 Q3.1
!RESET
  Top 0.254: S1.3 86.43,6.48 U$24.RST
  Bottom 0.254: S1.4 S1.3 80.12,16.71 R12.P$1 74.42,16.71 71.12,20.01 67.18,20.01 65.41,21.79 61.72,21.79 60.96,22.55 IC2.9 60.96,25.6 JP25.2
!RESET1
  Top 0.254: S2.3 86.43,56.48 U$1.RST
  Bottom 0.254: S2.4 S2.3 80.12,66.71 R13.P$1 74.42,66.71 71.12,70.01 67.18,70.01 65.41,71.79 61.72,71.79 60.96,72.55 IC4.9 60.96,75.6 JP59.2
!STEP-ENABLE
  Top 0.254: IC2.20 33.02,28.19 34.24,29.41 P2.!EN
  Bottom 0.254: P4.!EN 74.93,29.66 74.04,30.55 69.22,30.55 68.58,29.92 68.58,28.65 68.2,28.27 35.43,28.27 P2.!EN 33.07,28.19 30.53,28.19 R7.P$1 27.81,28.27 15.11,28.27 P1.!EN
!STEP-ENABLE1
  Top 0.254: IC4.20 33.02,78.19 34.24,79.41 P6.!EN
  Bottom 0.254: P8.!EN 74.93,79.66 74.04,80.55 69.22,80.55 68.58,79.92 68.58,78.65 68.2,78.27 35.43,78.27 P6.!EN 33.07,78.19 30.53,78.19 R23.P$1 27.81,78.27 15.11,78.27 P5.!EN
!STEP-ENABLE-Z  (via drill 0.51)
  Top 0.254: v55.88,25.85 55.88,27.12 54.61,28.39 P3.!EN 53.47,30.55 48.9,30.55 48.26,29.92 48.26,28.14 R8.P$1 | IC2.35 68.58,14.42 67.06,15.95 67.06,17.73 64.64,20.14 61.85,20.14 59.69,22.3 59.69,24.71 58.55,25.85 v58.29,25.85
  Bottom 0.254: v55.88,25.85 v58.29,25.85
!STEP-ENABLE-Z1  (via drill 0.51)
  Top 0.254: v55.88,75.85 55.88,77.12 54.61,78.39 P7.!EN 53.47,80.55 48.9,80.55 48.26,79.92 48.26,78.14 R24.P$1 | IC4.35 68.58,64.42 67.06,65.95 67.06,67.73 64.64,70.14 61.85,70.14 59.69,72.3 59.69,74.71 58.55,75.85 v58.29,75.85
  Bottom 0.254: v55.88,75.85 v58.29,75.85
#DTR  (via drill 0.51 pad 1.02)
  Top 0.254: v33.45,20.93 35.05,20.93 v37.85,18.13
  Bottom 0.254: IC100.2 43.03,20.32 | IC100.2 40,20.29 v37.85,18.13 | JP26.1 14.73,6.04 14.73,11.88 16.76,13.92 22,13.92 26.98,18.89 30.63,18.89 32.66,20.93 v33.45,20.93 | C7.2 49.53,22.55 48.77,21.79 45.34,21.79 44.45,22.68 44.45,25.09 43.94,25.6 42.42,25.6 41.91,25.09 41.91,22.55 42.67,21.79 43.69,21.79 44.2,21.28 44.2,20.52 43.96,20.29 IC100.2
#DTR1  (via drill 0.51 pad 1.02)
  Top 0.254: v33.45,70.93 35.05,70.93 v37.85,68.13
  Bottom 0.254: IC3.2 43.03,70.32 | IC3.2 40,70.28 v37.85,68.13 | JP57.1 14.73,56.04 14.73,61.88 16.76,63.92 22,63.92 26.98,68.89 30.63,68.89 32.66,70.93 v33.45,70.93 | C21.2 49.53,72.55 48.77,71.79 45.34,71.79 44.45,72.68 44.45,75.09 43.94,75.6 42.42,75.6 41.91,75.09 41.91,72.55 42.67,71.79 43.69,71.79 44.2,71.28 44.2,70.52 43.96,70.28 IC3.2
A0
  Top 0.254: U$24.A0 81.96,2.74 80.8,3.3 80.8,8.41 IC2.40
A1
  Top 0.254: IC2.39 78.14,4.11 U$24.A1
A2
  Top 0.254: IC2.38 75.6,4.21 U$24.A2
A3
  Top 0.254: IC2.37 72.96,4.11 U$24.A3
A4
  Top 0.254: IC2.36 70.62,3.51 U$24.A4
A5
  Top 0.254: U$1.A0 81.96,52.74 80.8,53.3 80.8,58.41 IC4.40
A6
  Top 0.254: IC4.39 78.14,54.11 U$1.A1
A7
  Top 0.254: IC4.38 75.6,54.21 U$1.A2
A8
  Top 0.254: IC4.37 72.96,54.11 U$1.A3
A9
  Top 0.254: IC4.36 70.62,53.51 U$1.A4
AIFO
  Bottom 0.254: 38.32,21.37 37.95,21.74 35,21.74 34.42,21.15 34.42,20.27 32.51,18.36 27.3,18.36 22.35,13.41 17.02,13.41 15.24,11.63 15.24,4.01 JP26.3 | 38.32,21.37 38.75,20.93 IC100.1 | 38.32,21.37 38.32,21.5 39.37,22.55 39.37,24.96 40.01,25.6 40.64,25.6 41.27,26.23 45.09,26.23 45.72,25.6 46.35,25.6 46.99,24.96 47.62,24.96 IC2.14
AIFO1
  Bottom 0.254: 38.32,71.37 37.95,71.74 35,71.74 34.42,71.16 34.42,70.27 32.51,68.36 27.3,68.36 22.35,63.41 17.02,63.41 15.24,61.63 15.24,54.01 JP57.3 | 38.32,71.37 38.75,70.94 IC3.1 | 38.32,71.37 38.32,71.5 39.37,72.55 39.37,74.97 40.01,75.6 40.64,75.6 41.27,76.23 45.09,76.23 45.72,75.6 46.35,75.6 46.99,74.97 47.62,74.97 IC4.14
AOFI  (via drill 0.51)
  Top 0.254: IC2.15 45.72,20.52 v46.63,19.61
  Bottom 0.254: JP26.2 15.37,1.34 28.07,1.34 34.29,7.57 34.29,11.12 35.05,11.88 36.58,11.88 37.34,12.65 37.34,14.42 41.25,18.34 IC100.5 45.36,18.34 v46.63,19.61
AOFI1  (via drill 0.51)
  Top 0.254: IC4.15 45.72,70.52 v46.63,69.61
  Bottom 0.254: JP57.2 15.37,51.34 28.07,51.34 34.29,57.57 34.29,61.12 35.05,61.88 36.58,61.88 37.34,62.65 37.34,64.42 41.25,68.34 IC3.5 45.36,68.34 v46.63,69.61
B-THERM  (via drill 0.51)
  Top 0.254: v80.11,13.61 85.24,18.74 R10.P$1 | IC2.34 67.31,7.82 69.34,7.82 69.85,8.33 69.85,11.68 v71.48,13.31
  Bottom 0.254: C9.1 84.71,22.68 84.71,19.25 85.22,18.74 R10.P$1 86.21,18.79 91.08,18.79 95.71,14.17 JP24.1 | v71.48,13.31 71.91,13.74 77.14,13.74 77.95,12.92 79.43,12.92 v80.11,13.61
B-THERM1  (via drill 0.51)
  Top 0.254: v80.11,63.61 85.24,68.74 R16.P$1 | IC4.34 67.31,57.82 69.34,57.82 69.85,58.33 69.85,61.68 v71.48,63.31
  Bottom 0.254: C27.1 84.71,72.68 84.71,69.25 85.22,68.74 R16.P$1 86.21,68.79 91.08,68.79 95.71,64.17 JP40.1 | v71.48,63.31 71.91,63.74 77.14,63.74 77.95,62.93 79.43,62.93 v80.11,63.61
E-DIR
  Bottom 0.254: IC2.1 83.97,27.02 90.22,27.02 92.61,29.41 P4.DIR
E-DIR1
  Bottom 0.254: IC4.1 83.97,77.02 90.22,77.02 92.61,79.41 P8.DIR
E-MOT-1A
  Top 2.286: P4.1A JP7.3
E-MOT-1A1
  Top 2.286: P8.1A JP34.3
E-MOT-1B
  Top 2.286: P4.1B JP7.4
E-MOT-1B1
  Top 2.286: P8.1B JP34.4
E-MOT-2A
  Top 2.286: P4.2A JP7.2
E-MOT-2A1
  Top 2.286: P8.2A JP34.2
E-MOT-2B
  Top 2.286: P4.2B JP7.1
E-MOT-2B1
  Top 2.286: P8.2B JP34.1
E-MS1
  Bottom 0.254: P4.MS1 JP18.1 77.47,33.22 78.74,34.49 R5.P$1
E-MS2
  Bottom 0.254: P4.MS2 JP19.1
E-MS3
  Bottom 0.254: P4.MS3 83.82,30.55 86.36,30.55 JP20.1
E-MS4
  Bottom 0.254: P8.MS1 JP48.1 77.47,83.22 78.74,84.49 R21.P$1
E-MS5
  Bottom 0.254: P8.MS2 JP49.1
E-MS6
  Bottom 0.254: P8.MS3 83.82,80.55 86.36,80.55 JP50.1
E-RESETSLEEP
  Bottom 0.254: P4.!RST P4.!SLP
E-RESETSLEEP1
  Bottom 0.254: P8.!RST P8.!SLP
E-STEP
  Bottom 0.254: IC2.2 82.14,27.73 88.39,27.73 90.07,29.41 P4.STEP
E-STEP1
  Bottom 0.254: IC4.2 82.14,77.73 88.39,77.73 90.07,79.41 P8.STEP
E-THERM  (via drill 0.51 pad 1.02)
  Top 0.254: v66.85,13.33 66.73,13.33 63.5,10.11 IC2.33 | v78.41,13.89 85.8,21.28 R9.P$1
  Bottom 0.254: R9.P$1 88.66,21.28 C10.1 92.56,25.14 95.91,21.79 JP22.1 | v66.85,13.33 67.82,14.3 78,14.3 v78.41,13.89
E-THERM1  (via drill 0.51 pad 1.02)
  Top 0.254: v66.85,63.33 66.73,63.33 63.5,60.11 IC4.33 | v78.41,63.89 85.8,71.28 R15.P$1
  Bottom 0.254: R15.P$1 88.66,71.28 C26.1 92.56,75.14 95.91,71.79 JP41.1 | v66.85,63.33 67.82,64.3 78,64.3 v78.41,63.89
ENDSTOP+V
  Bottom 0.254: JP27.2 35.69,4.14 43.05,4.14 JP28.2 45.85,4.14 53.09,4.14 JP29.2 56.77,4.9 62.36,4.9 62.99,4.26 SJ100.2
ENDSTOP+V1
  Bottom 0.254: JP42.2 35.69,54.14 43.05,54.14 JP43.2 45.85,54.14 53.09,54.14 JP44.2 56.77,54.9 62.36,54.9 62.99,54.26 SJ1.2
GND  (via drill 0.51 pad 1.02)
  other vias: 55.88,20.39
  pour Top (isolate 0.254, rank 2): 3.81,0.2 arc-90 0,4.01 0,47.19 arc-90 3.81,49.7 97.79,49.7 arc-90 100,47.19 100,4.01 arc-90 97.79,0.2
  pour Bottom (isolate 0.254, rank 2): 100,4.01 arc-90 97.79,0.2 3.81,0.2 arc-90 0,4.01 0,47.19 arc-90 3.81,49.7 97.79,49.7 arc-90 100,47.19
GND1  (via drill 0.51 pad 1.02)
  other vias: 55.88,70.39
  pour Top (isolate 0.254, rank 2): 3.81,50.7 arc-90 0,54.01 0,97.19 arc-90 3.81,100.2 97.79,100.2 arc-90 100,97.19 100,54.01 arc-90 97.79,50.7
  pour Bottom (isolate 0.254, rank 2): 100,54.01 arc-90 97.79,50.7 3.81,50.7 arc-90 0,54.01 0,97.19 arc-90 3.81,100.2 97.79,100.2 arc-90 100,97.19
HOTBED-GND
  pour Top (isolate 0.254, no thermals): 2.29,30.17 3.81,30.17 7.62,26.36 9.91,26.36 10.16,26.11 10.16,25.09 9.91,24.84 4.06,24.84 2.79,26.11 2.29,26.11 1.78,26.62 1.78,29.66
HOTBED-GND1
  pour Top (isolate 0.254, no thermals): 2.29,80.17 3.81,80.17 7.62,76.36 9.91,76.36 10.16,76.11 10.16,75.09 9.91,74.84 4.06,74.84 2.79,76.11 2.29,76.11 1.78,76.62 1.78,79.66
HOTEND-GND
  pour Top (isolate 0.254, no thermals): 2.29,42.87 3.81,42.87 7.62,39.06 9.91,39.06 10.16,38.81 10.16,37.79 9.91,37.54 4.06,37.54 2.79,38.81 2.29,38.81 1.78,39.32 1.78,42.36
HOTEND-GND1
  pour Top (isolate 0.254, no thermals): 2.29,92.87 3.81,92.87 7.62,89.06 9.91,89.06 10.16,88.81 10.16,87.79 9.91,87.54 4.06,87.54 2.79,88.81 2.29,88.81 1.78,89.32 1.78,92.36
LED1
  Top 0.254: R1.P$1 91.31,45.79 LED1.A
LED2
  Top 0.254: R17.P$1 91.31,95.79 LED2.A
N$1
  pour Top: 63.02,56.3 61.59,54.86 arc270 64.46,54.86
N$2
  pour Top: 63.02,6.3 61.59,4.86 arc270 64.46,4.86
PB4-PWM
  Top 0.254: U$24.PWM 72.39,14.93 69.6,17.73 69.6,19.76 67.31,22.04 67.31,24.84 68.07,25.6 70.1,25.6 71.12,24.58 IC2.5
PB4-PWM1
  Top 0.254: U$1.PWM 72.39,64.93 69.6,67.73 69.6,69.76 67.31,72.04 67.31,74.84 68.07,75.6 70.1,75.6 71.12,74.58 IC4.5
PB5-MOSI
  Top 0.254: IC2.6 68.58,21.79 77.72,12.65 86.55,12.65 89.5,9.7 89.5,8.7 91,7.2 91,4.07 U$24.MOSI
PB5-MOSI1
  Top 0.254: IC4.6 68.58,71.79 77.72,62.65 86.55,62.65 89.5,59.7 89.5,58.7 91,57.2 91,54.07 U$1.MOSI
PB6-MISO  (via drill 0.51 pad 1.02)
  Top 0.254: v90.47,11.68 90.47,9.17 92.21,7.43 U$24.MISO
  Bottom 0.254: v90.47,11.68 87.58,11.68 80.67,18.59 73.3,18.59 71.37,20.52 67.44,20.52 66.04,21.92 IC2.7
PB6-MISO1  (via drill 0.51 pad 1.02)
  Top 0.254: v90.47,61.68 90.47,59.17 92.21,57.43 U$1.MISO
  Bottom 0.254: v90.47,61.68 87.58,61.68 80.67,68.59 73.3,68.59 71.37,70.52 67.44,70.52 66.04,71.92 IC4.7
PB7-SCK  (via drill 0.51 pad 1.02)
  Top 0.254: IC2.8 63.5,23.31 67.72,19.09 v68.45,19.09 | U$24.SCK 89.67,5.53 88,7.2 88,8.97 v87.94,9.04
  Bottom 0.254: v68.45,19.09 71.28,19.09 75.18,15.19 79.88,15.19 85.22,9.85 85.22,9.6 85.78,9.04 v87.94,9.04
PB7-SCK1  (via drill 0.51 pad 1.02)
  Top 0.254: IC4.8 63.5,73.31 67.72,69.09 v68.45,69.09 | U$1.SCK 89.67,55.53 88,57.2 88,58.97 v87.94,59.04
  Bottom 0.254: v68.45,69.09 71.28,69.09 75.18,65.19 79.88,65.19 85.22,59.85 85.22,59.6 85.78,59.04 v87.94,59.04
PC0-SCL  (via drill 0.51 pad 1.02)
  Top 0.305: U$24.SCL 82.58,5.28 84,6.7 84,9.16 v83.82,9.34
  Bottom 0.254: IC2.22 35.56,10.87 36.07,11.38 37.08,11.38 37.34,11.63 82.04,11.63 83.82,9.85 v83.82,9.34
PC0-SCL1  (via drill 0.51 pad 1.02)
  Top 0.305: U$1.SCL 82.58,55.28 84,56.7 84,59.16 v83.82,59.34
  Bottom 0.254: IC4.22 35.56,60.87 36.07,61.38 37.08,61.38 37.34,61.63 82.04,61.63 83.82,59.85 v83.82,59.34
PC1-SDA
  Bottom 0.254: IC2.23 38.1,8.58 39.12,7.57 55.37,7.57 55.88,7.06 65.53,7.06 66.04,6.55 67.82,6.55 68.08,6.29 68.08,5.27 68.34,4.01 78.74,4.01 U$24.SDA
PC1-SDA1
  Bottom 0.254: IC4.23 38.1,58.58 39.12,57.57 55.37,57.57 55.88,57.06 65.53,57.06 66.04,56.55 67.82,56.55 68.08,56.29 68.08,55.27 68.34,54.01 78.74,54.01 U$1.SDA
PD2-RX1  (via drill 0.51 pad 1.02)
  Top 0.254: v70.72,18.17 77.47,11.43 U$24.RX1
  Bottom 0.254: v70.72,18.17 67.93,18.17 64.97,21.13 60.86,21.13 60.2,21.79 49.66,21.79 49,21.13 45.19,21.13 43.18,23.14 IC2.16
PD2-RX2  (via drill 0.51 pad 1.02)
  Top 0.254: v70.72,68.17 77.47,61.43 U$1.RX1
  Bottom 0.254: v70.72,68.17 67.93,68.17 64.97,71.13 60.86,71.13 60.2,71.79 49.66,71.79 49,71.13 45.19,71.13 43.18,73.14 IC4.16
PD3-TX1  (via drill 0.51 pad 1.02)
  Top 0.254: IC2.17 40.64,23.34 42.19,21.79 43.18,21.79 47.98,16.99 v47.98,16 | U$24.TX1 74.93,12.01 v74.17,12.77
  Bottom 0.254: v47.98,16 51.59,12.39 73.79,12.39 v74.17,12.77
PD3-TX2  (via drill 0.51 pad 1.02)
  Top 0.254: IC4.17 40.64,73.34 42.19,71.79 43.18,71.79 47.98,66.99 v47.98,66 | U$1.TX1 74.93,62.01 v74.17,62.77
  Bottom 0.254: v47.98,66 51.59,62.39 73.79,62.39 v74.17,62.77
USBDM
  Bottom 0.254: J1.D- 16.53,11.9 17.53,12.9 19.81,12.9 20.57,12.14 33.78,12.14 34.78,13.13 IC100.16
USBDM1
  Bottom 0.254: J2.D- 16.53,61.9 17.53,62.9 19.81,62.9 20.57,62.14 33.78,62.14 34.78,63.14 IC3.16
USBDP
  Bottom 0.254: IC100.15 34.89,12.48 34.04,11.63 20.32,11.63 19.56,12.39 18.54,12.39 17.78,11.63 17.78,10.49 16.53,9.24 J1.D+
USBDP1
  Bottom 0.254: IC3.15 34.89,62.48 34.04,61.63 20.32,61.63 19.56,62.39 18.54,62.39 17.78,61.63 17.78,60.49 16.53,59.24 J2.D+
X-DIR
  Top 0.254: IC2.27 48.26,11.12 45.21,14.17 41.91,14.17 39.37,16.71 39.37,17.98 35.56,21.79 34.67,21.79 34.29,22.17 34.29,26.62 35.56,27.89 35.56,29.92 34.8,30.68 32.77,30.68 31.75,29.66 P1.DIR
X-DIR1
  Top 0.254: IC4.27 48.26,61.12 45.21,64.17 41.91,64.17 39.37,66.71 39.37,67.98 35.56,71.79 34.67,71.79 34.29,72.17 34.29,76.62 35.56,77.89 35.56,79.92 34.8,80.68 32.77,80.68 31.75,79.66 P5.DIR
X-MOT-1A
  Top 2.286: P1.1A JP1.3
X-MOT-1A1
  Top 2.286: P5.1A JP31.3
X-MOT-1B
  Top 2.286: P1.1B JP1.4
X-MOT-1B1
  Top 2.286: P5.1B JP31.4
X-MOT-2A
  Top 2.286: P1.2A JP1.2
X-MOT-2A1
  Top 2.286: P5.2A JP31.2
X-MOT-2B
  Top 2.286: P1.2B JP1.1
X-MOT-2B1
  Top 2.286: P5.2B JP31.1
X-MS1
  Bottom 0.254: P1.MS1 JP9.1 16.51,33.22 17.78,34.49 R2.P$1
X-MS2
  Bottom 0.254: P1.MS2 JP10.1
X-MS3
  Bottom 0.254: P1.MS3 22.73,30.55 25.27,30.55 JP11.1
X-MS4
  Bottom 0.254: P5.MS2 JP52.1
X-MS5
  Bottom 0.254: P5.MS3 22.73,80.55 25.27,80.55 JP53.1
X-MS6
  Bottom 0.254: P5.MS1 JP51.1 16.51,83.22 17.78,84.49 R22.P$1
X-RESETSLEEP
  Bottom 0.254: P1.!RST P1.!SLP
X-RESETSLEEP1
  Bottom 0.254: P5.!RST P5.!SLP
X-STEP
  Top 0.254: P1.STEP 29.46,29.41 31.24,27.63 31.24,22.04 32.38,20.9 32.38,19.25 33.02,18.61 IC2.21
X-STEP1
  Top 0.254: P5.STEP 29.46,79.41 31.24,77.63 31.24,72.04 32.38,70.9 32.38,69.25 33.02,68.62 IC4.21
X-STOP
  Top 0.254: JP27.1 36.83,5.28 IC2.24
X-STOP1
  Top 0.254: JP42.1 36.83,55.28 IC4.24
XTAL1
  Top 0.254: Y1.3 50.55,15.69 50.55,24.08 IC2.13
XTAL2
  Top 0.254: IC2.12 53.34,22.04 53.21,21.92 52.7,21.92 52.58,21.79 52.58,21.54 52.7,21.41 53.59,21.41 53.72,21.28 53.72,21.03 53.59,20.9 52.7,20.9 52.58,20.77 52.58,20.52 52.7,20.39 53.85,20.39 53.98,20.27 53.98,19.38 53.85,19.25 Y1.1
XTAL3
  Top 0.254: IC4.12 53.34,72.04 53.21,71.92 52.7,71.92 52.58,71.79 52.58,71.54 52.7,71.41 53.59,71.41 53.72,71.28 53.72,71.03 53.59,70.9 52.7,70.9 52.58,70.77 52.58,70.52 52.7,70.39 53.85,70.39 53.98,70.27 53.98,69.38 53.85,69.25 Y2.1
XTAL4
  Top 0.254: Y2.3 50.55,65.69 50.55,74.08 IC4.13
Y-DIR
  Top 0.254: IC2.29 53.34,11.12 54.74,12.52 54.74,27.38 52.7,29.41 P2.DIR
Y-DIR1
  Top 0.254: IC4.29 53.34,61.12 54.74,62.52 54.74,77.38 52.7,79.41 P6.DIR
Y-MOT-1A
  Top 2.286: P2.1A JP3.3
Y-MOT-1A1
  Top 2.286: P6.1A JP32.3
Y-MOT-1B
  Top 2.286: P2.1B JP3.4
Y-MOT-1B1
  Top 2.286: P6.1B JP32.4
Y-MOT-2A
  Top 2.286: P2.2A JP3.2
Y-MOT-2A1
  Top 2.286: P6.2A JP32.2
Y-MOT-2B
  Top 2.286: P2.2B JP3.1
Y-MOT-2B1
  Top 2.286: P6.2B JP32.1
Y-MS1
  Bottom 0.254: P2.MS1 JP12.1 36.83,33.22 38.1,34.49 R3.P$1
Y-MS2
  Bottom 0.254: P2.MS2 JP13.1
Y-MS3
  Bottom 0.254: P2.MS3 43.05,30.55 45.59,30.55 JP14.1
Y-MS4
  Bottom 0.254: P6.MS1 JP35.1 36.83,83.22 38.1,84.49 R14.P$1
Y-MS5
  Bottom 0.254: P6.MS2 JP36.1
Y-MS6
  Bottom 0.254: P6.MS3 43.05,80.55 45.59,80.55 JP37.1
Y-RESETSLEEP
  Bottom 0.254: P2.!RST P2.!SLP
Y-RESETSLEEP1
  Bottom 0.254: P6.!RST P6.!SLP
Y-STEP
  Top 0.254: IC2.28 50.44,9.45 50.44,14.73 49.66,15.52 49.66,24.86 50.83,26.03 50.83,28.06 49.53,29.36 P2.STEP
Y-STEP1
  Top 0.254: IC4.28 50.44,59.45 50.44,64.73 49.66,65.52 49.66,74.86 50.83,76.03 50.83,78.06 49.53,79.36 P6.STEP
Y-STOP
  Top 0.254: JP28.1 46.99,5.28 IC2.25
Y-STOP1
  Top 0.254: JP43.1 46.99,55.28 IC4.25
Z-DIR
  Bottom 0.254: IC2.3 72.39,28.14 P3.DIR
Z-DIR1
  Bottom 0.254: IC4.3 72.39,78.14 P7.DIR
Z-MOT-1A
  Top 2.286: P3.1A JP30.3 JP5.3
Z-MOT-1A1
  Top 2.286: P7.1A JP60.3 JP33.3
Z-MOT-1B
  Top 2.286: P3.1B JP30.4 JP5.4
Z-MOT-1B1
  Top 2.286: P7.1B JP60.4 JP33.4
Z-MOT-2A
  Top 2.286: P3.2A JP30.2 JP5.2
Z-MOT-2A1
  Top 2.286: P7.2A JP60.2 JP33.2
Z-MOT-2B
  Top 2.286: P3.2B JP30.1 JP5.1
Z-MOT-2B1
  Top 2.286: P7.2B JP60.1 JP33.1
Z-MS1
  Top 0.254: P3.MS1 JP15.1
  Bottom 0.254: JP15.1 57.15,33.22 58.42,34.49 R4.P$1
Z-MS2
  Bottom 0.254: P3.MS2 JP16.1
Z-MS3
  Bottom 0.254: P3.MS3 63.37,30.55 65.91,30.55 JP17.1
Z-MS4
  Bottom 0.254: P7.MS2 JP46.1
Z-MS5
  Bottom 0.254: P7.MS3 63.37,80.55 65.91,80.55 JP47.1
Z-MS6
  Top 0.254: P7.MS1 JP45.1
  Bottom 0.254: JP45.1 57.15,83.22 58.42,84.49 R20.P$1
Z-RESETSLEEP
  Bottom 0.254: P3.!RST P3.!SLP
Z-RESETSLEEP1
  Bottom 0.254: P7.!RST P7.!SLP
Z-STEP
  Bottom 0.254: IC2.4 69.85,28.14 P3.STEP
Z-STEP1
  Bottom 0.254: IC4.4 69.85,78.14 P7.STEP
Z-STOP
  Top 0.254: JP29.1 54.61,5.28 49.53,5.28 IC2.26
Z-STOP1
  Top 0.254: JP44.1 54.61,55.28 49.53,55.28 IC4.26

## Text on the board
Top: 100004681
_tsilk: X-MOTOR | Y-MOTOR | Z-MOTOR | E-MOTOR | Sanguinololu | Rev 1.3a | POWER | PWR1/TIP | 2B | 2A | 1A | 1B | GND | +12V | 2B | 2A | 1A | 1B | GND | +12V | GND | +12V | 2B | 2A | 1A | 1B | C5 | -V | POLOLU-X | POLOLU-Y | POLOLU-Z | POLOLU-E | +12V | C1 | C2 | C3 | C4 | R1 | MS2 | R2 | MS2 | R3 | MS2 | R4 | MS2 | R5 | LM7805 | Q1 | MS3 | MS3 | MS3 | MS3 | PWR2/BED | MS1 | MS1 | MS1 | MS1 | -V | AUTO | RST | C6 | R7 | R8 | C7 | R6 | +12V | C8 | C9 | C10 | Q2 | R9 | C12 | ATMEGA644P | E-THERM | ATX+4 | C11 | C13 | R10 | Y1 | R11 | C14 | R12 | RESET | GND | 12V | C15 | B-THERM | S1 | C16 | SCREW | reprap.org/wiki/sanguinololu | PWM | TX1 | RX1 | SDA | SCL | GND | 12V | 5V | D12 | D11 | D10 | D17 | D16 | !RESET | SCK | MISO | GND | +V | SIG | GND | +V | SIG | GND | +V | SIG | EXT V2 | ISP/SPI | USB2TTL | X-STOP | Y-STOP | Z-STOP | TX0 | RX0 | 5V | GND | DTR | GND | GND | GND | A4 | A3 | A2 | A1 | A0 | GND | MOSI | 5V | X-MOTOR | Y-MOTOR | Z-MOTOR | E-MOTOR | Sanguinololu | Rev 1.3a | POWER | PWR1/TIP | 2B | 2A | 1A | 1B | GND | +12V | 2B | 2A | 1A | 1B | GND | +12V | GND | +12V | 2B | 2A | 1A | 1B | C5 | -V | POLOLU-X | POLOLU-Y | POLOLU-Z | POLOLU-E | +12V | C1 | C2 | C3 | C4 | R1 | MS2 | R2 | MS2 | R3 | MS2 | R4 | MS2 | R5 | LM7805 | Q1 | MS3 | MS3 | MS3 | MS3 | PWR2/BED | MS1 | MS1 | MS1 | MS1 | -V | AUTO | RST | C6 | R7 | R8 | C7 | R6 | +12V | C8 | C9 | C10 | Q2 | R9 | C12 | ATMEGA644P | E-THERM | ATX+4 | C11 | C13 | R10 | Y1 | R11 | C14 | R12 | RESET | GND | 12V | C15 | B-THERM | S1 | C16 | SCREW | reprap.org/wiki/sanguinololu | PWM | TX1 | RX1 | SDA | SCL | GND | 12V | 5V | D12 | D11 | D10 | D17 | D16 | !RESET | SCK | MISO | GND | +V | SIG | GND | +V | SIG | GND | +V | SIG | EXT V2 | ISP/SPI | USB2TTL | X-STOP | Y-STOP | Z-STOP | TX0 | RX0 | 5V | GND | DTR | GND | GND | GND | A4 | A3 | A2 | A1 | A0 | GND | MOSI | 5V
_bsilk: X-MOTOR | Y-MOTOR | Z-MOTOR | E-MOTOR | PWR1/TIP | 2B | 2A | 1A | 1B | GND | +12V | 2B | 2A | 1A | 1B | GND | +12V | GND | +12V | 2B | 2A | 1A | 1B | -V | +12V | PWR2/BED | -V | +12V | E-THERM | ATX+4 | FT232RL | B-THERM | GND | 12V | SCREW | PWM | TX1 | RX1 | SDA | SCL | GND | STOP | VOLT | 12V | 5V | D12 | D11 | D10 | D17 | D16 | !RESET | SCK | MISO | GND | +V | SIG | GND | +V | SIG | GND | +V | SIG | 12V | EXT V2 | USB2TTL | 5V | SPI | TX0 | RX0 | 5V | GND | DTR | GND | X-STOP | Y-STOP | Z-STOP | GND | GND | A4 | A3 | A2 | A1 | A0 | GND | MOSI | 5V | X-MOTOR | Y-MOTOR | Z-MOTOR | E-MOTOR | PWR1/TIP | 2B | 2A | 1A | 1B | GND | +12V | 2B | 2A | 1A | 1B | GND | +12V | GND | +12V | 2B | 2A | 1A | 1B | -V | +12V | PWR2/BED | -V | +12V | E-THERM | ATX+4 | FT232RL | B-THERM | GND | 12V | SCREW | PWM | TX1 | RX1 | SDA | SCL | GND | STOP | VOLT | 12V | 5V | D12 | D11 | D10 | D17 | D16 | !RESET | SCK | MISO | GND | +V | SIG | GND | +V | SIG | GND | +V | SIG | 12V | EXT V2 | USB2TTL | 5V | SPI | TX0 | RX0 | 5V | GND | DTR | GND | X-STOP | Y-STOP | Z-STOP | GND | GND | A4 | A3 | A2 | A1 | A0 | GND | MOSI | 5V